# Altium PCB PWR MOD 1.0.PcbDoc
Units mil, origin at the board's own origin, x right, y up, seen from the top; angles counter-clockwise.
Board outline 2750 x 1732.28 mil, 2 copper layers (Top Layer, Bottom Layer), stack 63.824 mil thick; 62 components, 32 nets, 181 pads, 214 vias.
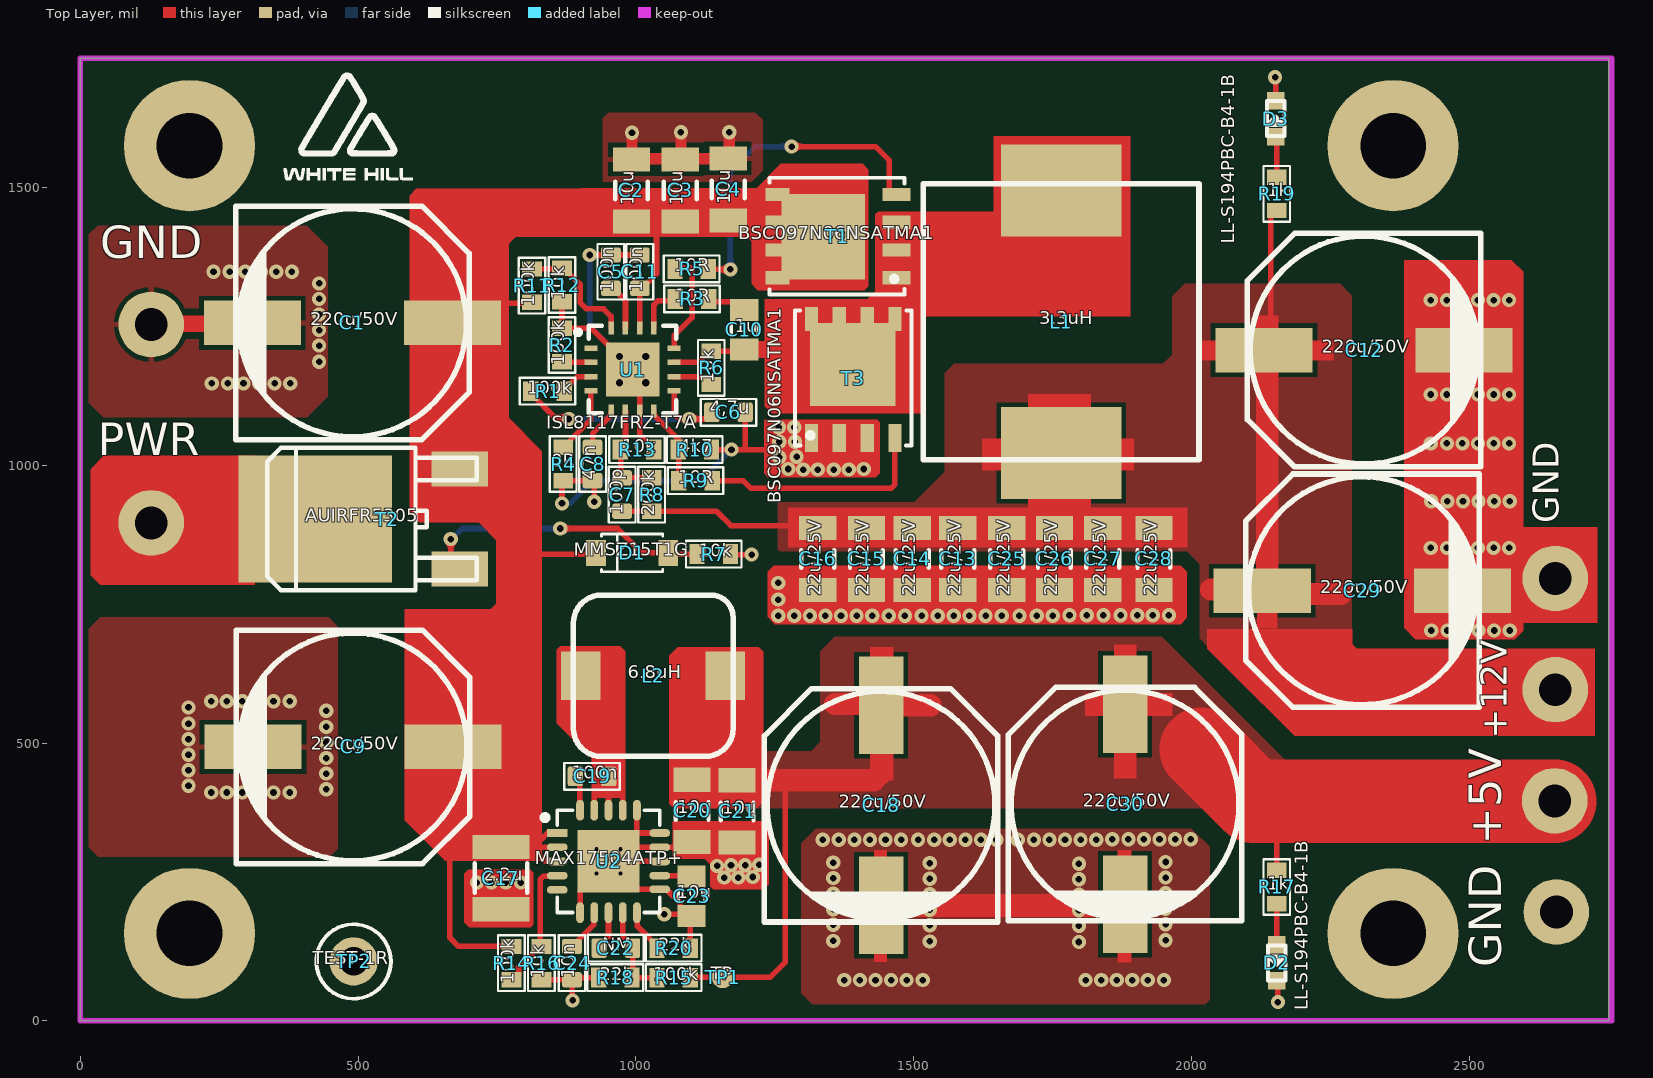
[diagram p0: Top Layer view]
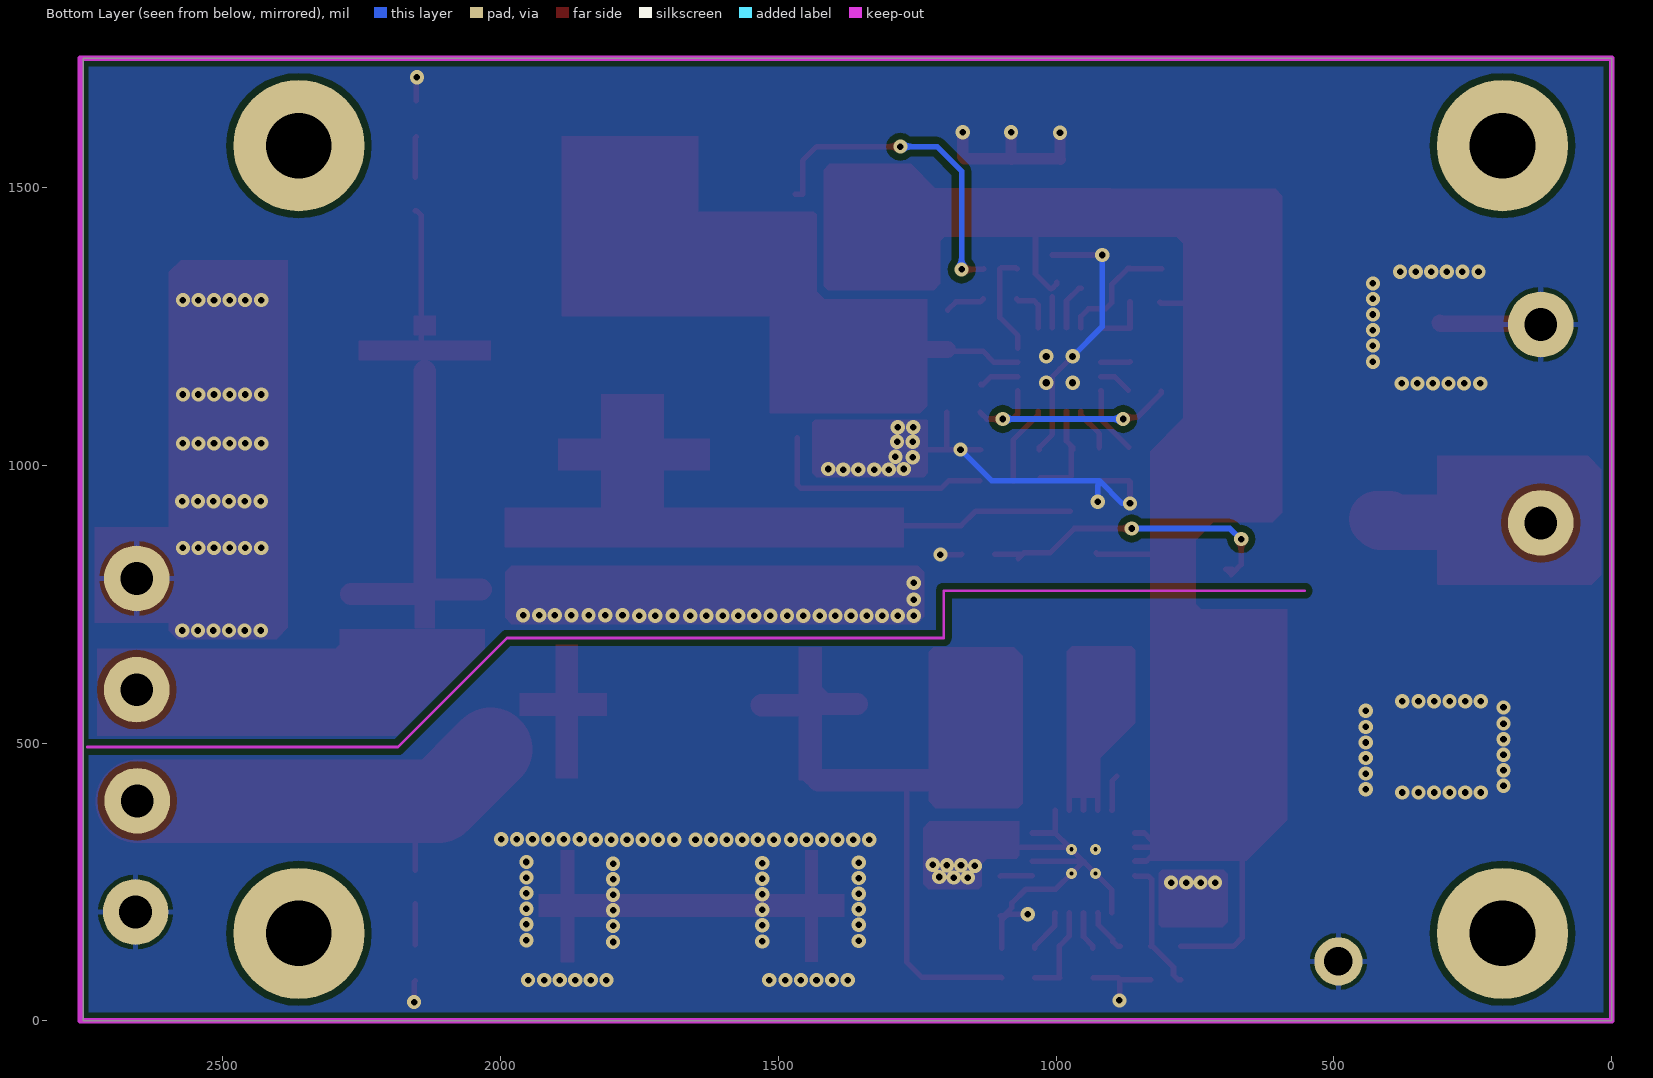
[diagram p1: Bottom Layer view, seen from below]
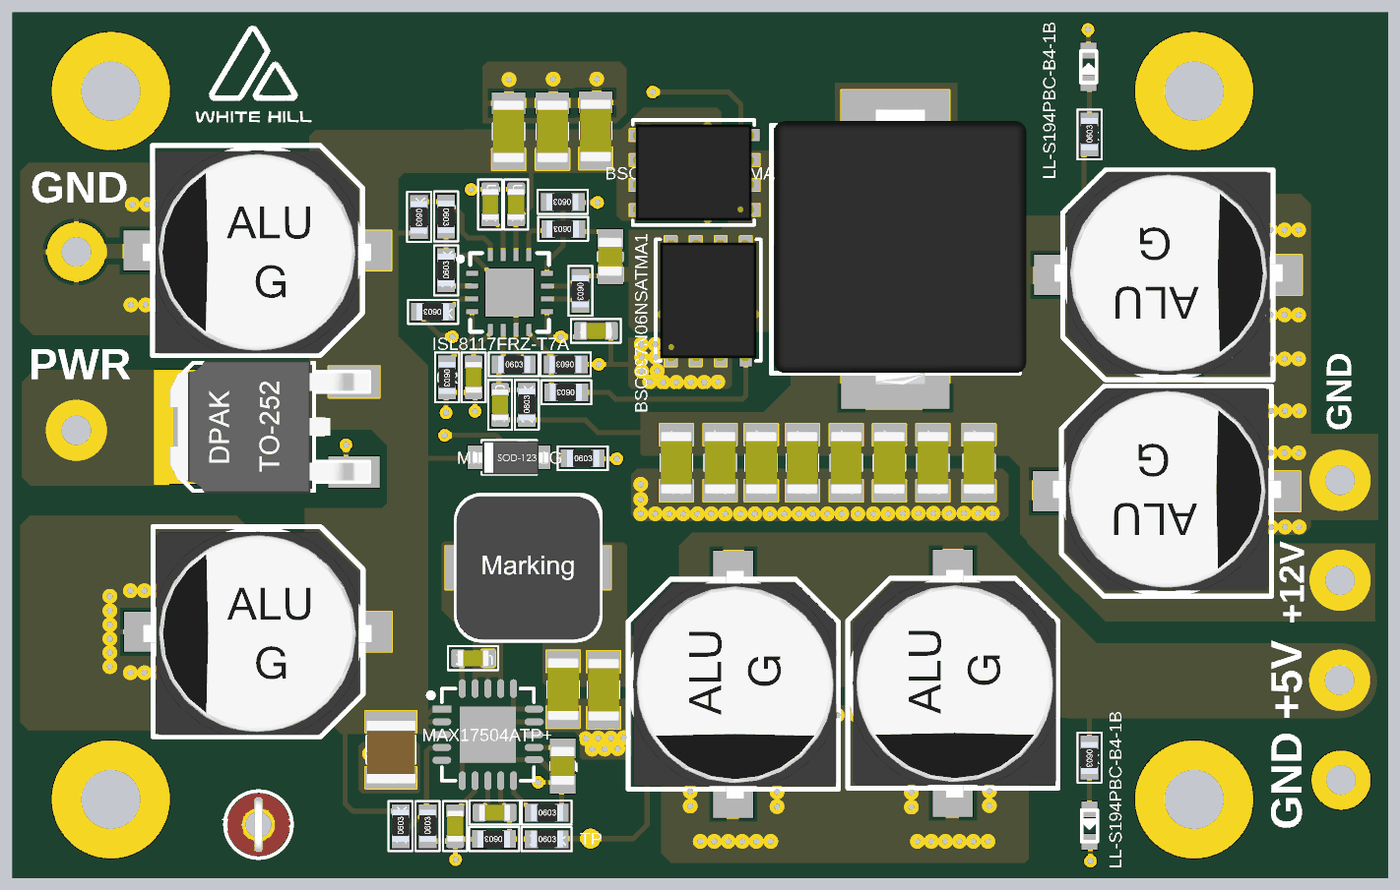
[diagram p2: 3D render of the assembled board from above, using the file's embedded part models]

## Layer stack, top to bottom
Top Solder: solder mask 0.4, Solder Resist, Dk 3.5
Top Layer: signal copper 1.4
Dielectric1: core 61.0236, FR-4, Dk 4.2
Bottom Layer: signal copper 1.4
Bottom Solder: solder mask 0.4, Solder Resist, Dk 3.5

## Board outline
0,0 0,1732.28 2750,1732.28 2750,0

## Design rules (kind name [scope] priority, off if disabled: settings)
Clearance Clearance_1 [(OnLayer('Keep-Out Layer'))] p1: gap=10 ignorepadtopadclearanceinfootprint=FALSE except(0: Arc-Hole Track-Hole SMDPad-Hole THPad-Hole Via-Hole Fill-Hole Poly-Hole Region-Hole Text-Hole)
Clearance Track [istrack vs istrack] p2: gap=6 ignorepadtopadclearanceinfootprint=FALSE except(0: Arc-Hole Track-Hole SMDPad-Hole THPad-Hole Via-Hole Fill-Hole Poly-Hole Region-Hole Text-Hole)
Clearance poly [inpoly] p3: gap=12 ignorepadtopadclearanceinfootprint=FALSE
Clearance [All] p4: gap=7 ignorepadtopadclearanceinfootprint=FALSE except(0: Arc-Hole Track-Hole SMDPad-Hole THPad-Hole Via-Hole Fill-Hole Poly-Hole Region-Hole Text-Hole)
ComponentClearance ComponentClearance_2 [HasFootprint('CR123')] p1: gap=0 collisioncheckmode=3 verticalgap=0 showdistances=TRUE
ComponentClearance ComponentClearance_1 [HasFootprint('ANT1')] p2: gap=0 collisioncheckmode=3 verticalgap=0 showdistances=TRUE
ComponentClearance [All] p3: gap=0 collisioncheckmode=3 verticalgap=0 showdistances=FALSE
HoleSize [All] p1: absolutevalues=TRUE maxlimit=1000 minlimit=10 maxpercent=80.000 minpercent=20.000
PolygonConnect CR123 [HasFootprint('CR123')] p1: connectstyle=Relief reliefconductorwidth=20 reliefentries=4 polygonreliefangle="90 Angle" airgapwidth=10
PolygonConnect coax [HasFootprint('COAXIAL-SWF')] p2: connectstyle=Direct reliefconductorwidth=10 reliefentries=4 polygonreliefangle="90 Angle" airgapwidth=10
PolygonConnect PolygonConnect_1 [isvia] p3: connectstyle=Direct reliefconductorwidth=10 reliefentries=4 polygonreliefangle="90 Angle" airgapwidth=10
PolygonConnect [All] p4: connectstyle=Relief reliefconductorwidth=10 reliefentries=4 polygonreliefangle="90 Angle" airgapwidth=8
RoutingVias [All] p1: holewidth=11.81 width=25.59 viastyle="Through Hole" minholewidth=11.81 minwidth=25.59 maxholewidth=11.81 maxwidth=25.59
SolderMaskExpansion SolderMaskExpansion_1 [isvia] p1: expansion=-100
SolderMaskExpansion [All] p2: expansion=2
Width [All] p1: maxlimit=200 minlimit=6 preferedwidth=10 minimp=50.000000 maximp=50.000000 favimp=50.000000
28 further rules are at their usual default settings.

## Components (designator, comment, footprint, x,y, rotation, side; value= is the part's Value field where it differs from the comment)
C1 "220u/50V" ALU-G 490,1256 r270 top
C2 "10u" C1206 992,1494.1 r90 top
C3 "10u" C1206 1079.8,1494.1 r90 top
C4 "10u" C1206 1166,1495.9 r90 top
C5 "100n" C0603 955,1348 r90 top
C6 "4,7u" C0603 1166.47,1095 r0 top
C7 "100p" C0603 975,947 r270 top
C8 "47n" C0603 922,1002 r270 top
C9 "220u/50V" ALU-G 491,493 r270 top
C10 "1u" C0805-10 1195,1243.43 r270 top
C11 "100n" C0603 1007,1348 r270 top
C12 "220u/50V" ALU-G 2310,1207 r90 top
C13 "22u/25V" C1206 1579,831.1 r270 top
C14 "22u/25V" C1206 1497,831.1 r270 top
C15 "22u/25V" C1206 1414.78,831.1 r270 top
C16 "22u/25V" C1206 1327,831.1 r270 top
C17 "2.2u" C1210 757,257 r180 top
C18 "220u/50V" ALU-G 1441,388 r0 top
C19 "100n" C0603 921,440 r0 top
C20 "10u" C1206 1101,377.9 r270 top
C21 "10u" C1206 1182,376.9 r270 top
C22 "NM" C0603 964,131 r0 top
C23 "10u" C0805-10 1100,224.57 r270 top
C24 "10n" C0603 885,104 r90 top
C25 "22u/25V" C1206 1667,831.1 r270 top
C26 "22u/25V" C1206 1753,831.1 r270 top
C27 "22u/25V" C1206 1840,831.1 r270 top
C28 "22u/25V" C1206 1932,831.1 r270 top
C29 "220u/50V" ALU-G 2307,774 r90 top
C30 "220u/50V" ALU-G 1880,390 r0 top
D1 "MMSZ15T1G" SOD123 993,842 r0 top
D2 "LL-S194PBC-B4-1B" LED0603B 2153,104.58 r270 top
D3 "LL-S194PBC-B4-1B" LED0603B 2151,1623.36 r90 top
L1 "3.3uH" HPI1260 1765,1258 r90 top
L2 "6.8uH" "L 7x7" 1031,621 r0 top
R1 "100k" R0603 840.94,1133 r180 top
R2 "100k" R0603 867,1216 r90 top
R3 "10R" R0603 1101,1299 r180 top
R4 "0R" R0603 869,1002 r270 top
R5 "10R" R0603 1100.17,1353 r180 top
R6 "10k" R0603 1135.48,1175 r270 top
R7 "10k" R0603 1140,840 r0 top
R8 "200k" R0603 1028.27,947 r90 top
R9 "10R" R0603 1107.28,972 r180 top
R10 "4k7" R0603 1106,1028 r180 top
R11 "100k" R0603 813,1323 r270 top
R12 "10k" R0603 867,1324 r270 top
R13 "10k" R0603 1002,1028 r0 top
R14 "100k" R0603 776,104 r90 top
R15 "100k" R0603 1068,77.93 r0 top
R16 "10k" R0603 830,104 r90 top
R17 "1k" R0603 2153,241 r270 top
R18 "22k" R0603 963,78 r180 top
R19 "1k" R0603 2153,1488 r90 top
R20 "22k" R0603 1068,131 r0 top
T1 "BSC097N06NSATMA1" "PowerPAK SO-8" 1362,1412 r180 top
T2 "AUIRFR5305" DPAK 553,903 r180 top
T3 "BSC097N06NSATMA1" "PowerPAK SO-8" 1391,1156 r90 top
TP1 "TP" TP 1156,79 r90 top
TP2 "TEST-1R" TP-O 492,107 r0 top
U1 "ISL8117FRZ-T7A" QFN-16-0.5 994,1172 r0 top
U2 "MAX17504ATP+" TQFN-20_5x5 950.67,287 r0 top

## Footprints (in the part's own frame and the unit in brackets; to place one, negate y for a bottom-side part, rotate by r counter-clockwise, add the part's x,y. Pads: shape width x height; smd on the part's side, far side on the other; paste and mask are expansions set on the pad)
ALU-G [mil]
  rect 80x175 smd: 1(0,180) 2(0,-180)
  silkscreen extent -210,-210 210,210, body extent -199,-229 207,227, height 402
C0603 [mm] "Chip Capacitor, Body 1.6x0.8mm, IPC High Density"
  rrect30% 0.7x0.9 smd: 1(-0.762,0) 2(0.762,0)
  silkscreen extent -1.27,-0.61 1.27,0.61, body extent -0.8,-0.4 0.8,0.4, height 0.5
C0805-10 [mm]
  rect 1x1.3 smd: 1(-0.9,0) 2(0.9,0)
  silkscreen extent -0.2,-0.6 0.2,0.6, body extent -1,-0.63 1,0.63, height 1
C1206 [mm]
  rect 1.1x1.7 smd: 1(-1.425,0) 2(1.425,0)
  silkscreen extent -0.4,-0.75 0.4,0.75, body extent -1.6,-0.8 1.6,0.8, height 1
C1210 [mm]
  rect 2.6x1.1 smd: 1(0,-1.425) 2(0,1.425)
  silkscreen extent -1.2,-0.67 1.2,0.67, body extent -1.25,-1.47 1.25,1.73, height 2.5
DPAK [mm]
  rect 2.6x1.6 smd: 1(-3.302,2.286) 3(-3.302,-2.286)
  rect 7x5.8 smd paste-3.048: 2(3.302,0)
  silkscreen extent -4.07,-3.25 5.5,3.25, body extent -4.08,-3.37 6.02,3.37, height 2.41
HPI1260 [mm] "SMT Power Inductor"
  rect 4.2x5.5 smd: 1(6,0) 2(-6,0)
  silkscreen extent -6.3,-6.3 6.3,6.3, body extent -6.87,-6.65 7.13,6.15, height 5.01
"L 7x7" [mm]
  rect 1.8x2.2 smd: 1(-3.3,0) 2(3.3,0)
  silkscreen extent -3.64,-3.68 3.66,3.68, body extent -3.65,-3.65 3.65,3.65, height 4.51
LED0603B [mm]
  rect 0.8x0.8 smd mask+0.051: A(-0.825,0) K(0.825,0)
  silkscreen extent -0.8,-0.4 0.8,0.4, body extent -0.8,-0.4 0.8,0.4, height 0.65
"PowerPAK SO-8" [mm]
  rect 3.81x3.91 smd: D(0.635,0.025)
  rect 1.1x0.61 smd: D(2.718,1.905) D(2.718,-0.635) D(2.718,0.635) D(2.718,-1.905)
  rect 1.27x0.61 smd: G(-2.718,-1.905) S(-2.718,1.905) S(-2.718,-0.635) S(-2.718,0.635)
  silkscreen extent -3.07,-2.67 3.1,2.67, body extent -3.07,-2.57 3.08,2.58, height 1.04
QFN-16-0.5 [mm] "QFN, 16-Leads, Body"
  rect 0.6x0.25 smd: 1(-1.9,0.975) 2(-1.9,0.325) 3(-1.9,-0.325) 4(-1.9,-0.975) 9(1.9,-0.975) 10(1.9,-0.325) 11(1.9,0.325) 12(1.9,0.975)
  rect 0.25x0.6 smd: 5(-0.975,-1.9) 6(-0.325,-1.9) 7(0.325,-1.9) 8(0.975,-1.9) 13(0.975,1.9) 14(0.325,1.9) 15(-0.325,1.9) 16(-0.975,1.9)
  rect 2.45x2.45 smd: 17(0,0)
  silkscreen extent -2.6,-2 2,2, body extent -2,-2 2,2, height 0.8
R0603 [mm] "Chip Resistor, Body 1.6x0.8mm, IPC High Density"
  rect 0.7x0.9 smd: 1(-0.762,0) 2(0.762,0)
  silkscreen extent -1.27,-0.61 1.27,0.61, body extent -0.8,-0.42 0.84,0.43, height 0.46
SOD123 [mm]
  rect 0.9x1.2 smd: 1(1.65,0) 2(-1.65,0)
  silkscreen extent -1.4,-0.86 1.4,0.86, body extent -1.85,-0.86 2,0.84, height 1.46
TP [mil]
  round 40 smd paste-100: 1(0,0)
TP-O [mm]
  round 2.2 hole 1.3 paste-2.54: 1(0,0)
  silkscreen extent -1.7,-1.7 1.7,1.7, body extent -1.59,-1.59 1.59,1.59, height 8.13
TQFN-20_5x5 [mm]
  rect 0.95x0.35 smd mask+0: 1(-2.34,1.3)
  oval 0.95x0.35 smd mask+0: 2(-2.34,0.65) 3(-2.34,0) 4(-2.34,-0.65) 5(-2.34,-1.3) 11(2.34,-1.27) 12(2.34,-0.65) 13(2.34,0) 14(2.34,0.65) 15(2.34,1.3)
  oval 0.35x0.95 smd mask+0: 6(-1.3,-2.34) 7(-0.65,-2.34) 8(0,-2.34) 9(0.65,-2.34) 10(1.3,-2.34) 16(1.3,2.34) 17(0.65,2.34) 18(0,2.34) 19(-0.65,2.34) 20(-1.3,2.34)
  rect 2.85x2.85 smd mask+0: 21(0,0)
  silkscreen extent -3.02,-2.34 2.34,2.34, body extent -2.34,-2.34 2.34,2.34, height 0.8

## Part data
C1 C9 C12 C18 C29 C30: library part CAP-EL, "Capacitor: electrolytic; low impedance; 220uF; 50VDC; Case: G", Manufacturer=Panasonic, Part Number=EEEFP1H221AP, ComponentLink1Description=Datasheet, ComponentLink1URL=D:\Datasheets\PANASONIC_FP.pdf, ComponentLink2Description=Dostawca, ComponentLink2URL=http://www.tme.eu/pl/katalog/?idp=1&search=EEEFP1H221AP, Supplier=TME, Supplier Code=EEEFP1H221AP
C2 C3 C4: library part C-028, "Capacitor: ceramic; 10uF; 50V; X7R; ±10%; SMD; 1206", Manufacturer=Samnsung, Part Number=CL31A106KBHNNNE, ComponentLink1Description=Datasheet, ComponentLink1URL=D:\Datasheets\.pdf, ComponentLink2Description=Dostawca, ComponentLink2URL=http://www.tme.eu/pl/katalog/?idp=1&search=CL31A106KBHNNNE, Indeks=C-0028, Supplier=TME, Supplier Code=CL31A106KBHNNNE
C5 C11 C19: library part C-013, "Capacitor: ceramic; 100nF; 50V; X7R; ±10%; SMD; 0603; Series: GRM", Manufacturer=Murata, Part Number=GRM188R71H104KA93D, ComponentLink1Description=Datasheet, ComponentLink1URL=D:\Datasheets\.pdf, ComponentLink2Description=Dostawca, ComponentLink2URL=http://www.tme.eu/pl/katalog/?idp=1&search=GRM188R71H104KA93D, Indeks=C-0013, Supplier=TME, Supplier Code=GRM188R71H104KA93D
C6: library part C-031, "Capacitor: ceramic;4,7uF ; 50V; X7R; ±5%; SMD; 0603", Manufacturer=Samsung, Part Number=0603X475K100CT, ComponentLink1Description=Datasheet, ComponentLink1URL=D:\Datasheets\.pdf, ComponentLink2Description=Dostawca, ComponentLink2URL=https://www.tme.eu/pl/katalog/?search=0603X475K100CT, Indeks=C-031, Supplier=TME, Supplier Code=0603X475K100CT
C7: library part C-005, "Capacitor: ceramic; MLCC; 100pF; 50V; C0G; ±1%; SMD; 0603", Manufacturer=Vishay, Part Number=VJ0603A101FXACW1BC, ComponentLink1Description=Datasheet, ComponentLink1URL=D:\Datasheets\.pdf, ComponentLink2Description=Dostawca, ComponentLink2URL=http://www.tme.eu/pl/katalog/?idp=1&search=VJ0603A101FXACW1BC, Indeks=C-005, Supplier=TME, Supplier Code=VJ0603A101FXACW1BC
C8: library part C-012, "Capacitor: ceramic; MLCC; 47nF; 50V; X7R; ±10%; SMD; 0603", Manufacturer=Kemet, Part Number=C0603C473K5RACTU, ComponentLink1Description=Datasheet, ComponentLink1URL=D:\Datasheets\.pdf, ComponentLink2Description=Dostawca, ComponentLink2URL=http://www.tme.eu/pl/katalog/?idp=1&search=C0603C473K5RAC, Indeks=C-0012, Supplier=TME, Supplier Code=C0603C473K5RAC
C10: library part C-017, "Capacitor: ceramic; MLCC; 1uF; 50V; X7R; SMD; 0805", Manufacturer=Samsung, Part Number=CL21B105KBFNNNG, ComponentLink1Description=Datasheet, ComponentLink1URL=D:\Datasheets\.pdf, ComponentLink2Description=Dostawca, ComponentLink2URL=http://www.tme.eu/pl/katalog/?idp=1&search=CL21F105ZBFNNNE, Indeks=C-0017, Supplier=TME, Supplier Code=CL21B105KBFNNNG
C13 C14 C15 C16 C25 C26 C27 C28: library part C-029, "Capacitor: ceramic; 22uF; 25V; X7R; ±10%; SMD; 1206", Manufacturer=Murata, Part Number=GRM31CR61E226KE15L, ComponentLink1Description=Datasheet, ComponentLink1URL=D:\Datasheets\.pdf, ComponentLink2Description=Dostawca, ComponentLink2URL=http://www.tme.eu/pl/katalog/?idp=1&search=GRM31CR61E226KE15L, Indeks=C-0029, Supplier=TME, Supplier Code=GRM31CR61E226KE15L
C17: library part C-020, "Capacitor: ceramic; MLCC; 2,2uF; 100V; X7R; ±10%; SMD; 1210", Manufacturer=Samnsung, Part Number=CL32B225KCJSNNE, ComponentLink1Description=Datasheet, ComponentLink1URL=D:\Datasheets\.pdf, ComponentLink2Description=Dostawca, ComponentLink2URL=http://www.tme.eu/pl/katalog/?idp=1&search=CL32B225KCJSNNE, Indeks=C-0020, Supplier=TME, Supplier Code=CL32B225KCJSNNE
C20 C21: library part C-022, "Capacitor: ceramic; 10uF; 35V; X7R; ±10%; SMD; 1206", Manufacturer=Samnsung, Part Number=CL31B106KLHNNNE, ComponentLink1Description=Datasheet, ComponentLink1URL=D:\Datasheets\.pdf, ComponentLink2Description=Dostawca, ComponentLink2URL=http://www.tme.eu/pl/katalog/?idp=1&search=CL31B106KLHNNNE, Indeks=C-0019, Supplier=TME, Supplier Code=CL31B106KLHNNNE
C22: library part C-013, Manufacturer=Murata, ComponentLink1Description=Datasheet, ComponentLink1URL=D:\Datasheets\.pdf, ComponentLink2Description=Dostawca, Indeks=C-0013, Supplier=TME
C23: library part C-019, "Capacitor: ceramic; MLCC; 10uF; 16V; X5R; ±10%; SMD; 0805", Manufacturer=Samnsung, Part Number=CL21A106KOQNNNG, ComponentLink1Description=Datasheet, ComponentLink1URL=D:\Datasheets\.pdf, ComponentLink2Description=Dostawca, ComponentLink2URL=http://www.tme.eu/pl/katalog/?idp=1&search=CL21A106KOQNNNG, Indeks=C-0019, Supplier=TME, Supplier Code=CL21A106KOQNNNG
C24: library part C-011, "Capacitor: ceramic; MLCC; 10nF; 50V; X7R; ±5%; SMD; 0603", Manufacturer=Vishay, Part Number=VJ0603Y103JXACW1BC, ComponentLink1Description=Datasheet, ComponentLink1URL=D:\Datasheets\.pdf, ComponentLink2Description=Dostawca, ComponentLink2URL=http://www.tme.eu/pl/katalog/?idp=1&search=VJ0603Y103JXACW1BC, Indeks=C-0011, Supplier=TME, Supplier Code=VJ0603Y103JXACW1BC
D1: library part D_ZEN, "Dioda: Zenera; 0,5W; 18V; SMD", Manufacturer="ON Semi", ComponentLink1Description=Datasheet, ComponentLink1URL=D:\Datasheets\MMSZxxxT1G.pdf, ComponentLink2Description=Dostawca, ComponentLink2URL=http://www.tme.eu/pl/katalog/?idp=1&search=MMSZ15T1G, Part Number=MMSZ15T1G, Supplier=TME, Supplier Code=MMSZ15T1G
D2 D3: library part LED_1, "LED; SMD; 0603; blue; 20-40mcd; 1.6x0.8x0.4mm; 130°; 2.8÷3.8V; 20mA", Manufacturer=LuckyLight, ComponentLink1Description=Datasheet, ComponentLink1URL=D:\Datasheets\.pdf, ComponentLink2Description=Dostawca, Part Number=LL-S194PBC-B4-1B, Supplier=TME, Supplier Code=LL-S194PBC-B4-1B
L1: library part L_HPI_3.3uH, "Inductor: wire; SMD; 3.3uH; Ioper:14A; 2.45mOhm; ±20%; Isat:15A", Manufacturer=Ferrocore, Part Number=HPI1260-3R3, ComponentLink1Description=Datasheet, ComponentLink1URL=E:\Datasheets\HPI1260.pdf, ComponentLink2Description=Dostawca, ComponentLink2URL=http://www.tme.eu/pl/katalog/?idp=1&search=HPI1260-3R3, Indeks=IND, Supplier=TME, Supplier Code=HPI1260-3R3
L2: library part L, "Inductor: wire; SMD; 6.8uH; Ioper:4.3A; 53m?; ±20%; Isat:4.9A", Manufacturer=Ferrocore, Part Number=HPI0630-6R8, ComponentLink1Description=Datasheet, ComponentLink1URL=D:\Datasheets\de.pdf, ComponentLink2Description=Dostawca, ComponentLink2URL=http://www.tme.eu/pl/katalog/?idp=1&search=HPI0630-6R8, Indeks=IND, Supplier=TME, Supplier Code=HPI0630-6R8
R1 R2 R11 R14 R15: library part R-013, "Resistor: thick film; SMD; 0603; 100k; 0.125W; ±5%", Manufacturer=Walsin, Part Number=WF06P104JTL, Tolerance=5%, ComponentLink1Description=Datasheet, ComponentLink1URL=D:\Datasheets\.pdf, ComponentLink2Description=Dostawca, ComponentLink2URL=http://www.tme.eu/pl/katalog/?idp=1&search=WF06P-100K-5%, Indeks=R-011, Supplier=TME, Supplier Code=WF06P-100K-5%
R3 R5 R9: library part R-001, "Resistor: thick film; SMD; 0603; 10R; 0.1W; ±5%", Manufacturer="Royal Ohm", Part Number=0603SAJ0100T5E, Tolerance=5%, ComponentLink1Description=Datasheet, ComponentLink1URL=D:\Datasheets\.pdf, ComponentLink2Description=Dostawca, ComponentLink2URL=http://www.tme.eu/pl/katalog/?idp=1&search=SMD0603-10R, Indeks=R-001, Supplier=TME, Supplier Code=SMD0603-10R
R4: library part R-018, "Resistor: thick film; SMD; 0603; 0R; 0.125W; ±5%", Manufacturer="Royal Ohm", Part Number=CRCW06030000Z0TABC, Tolerance=1%, ComponentLink1Description=Datasheet, ComponentLink1URL=D:\Datasheets\.pdf, ComponentLink2Description=Dostawca, ComponentLink2URL=http://www.tme.eu/pl/katalog/?idp=1&search=CRCW06030000Z0TABC, Indeks=R-018, Supplier=TME, Supplier Code=CRCW06030000Z0TABC
R6 R7 R12 R13 R16: library part R-012, "Resistor: thick film; SMD; 0603; 10k; 0.125W; ±5%", Manufacturer=Walsin, Part Number=WF06P103JTL, Tolerance=5%, ComponentLink1Description=Datasheet, ComponentLink1URL=D:\Datasheets\.pdf, ComponentLink2Description=Dostawca, ComponentLink2URL=http://www.tme.eu/pl/katalog/?idp=1&search=WF06P-10K-5%, Indeks=R-011, Supplier=TME, Supplier Code=WF06P-10K-5%
R8: library part R-042, "Resistor: thick film; SMD; 0805; 200k; 0.125W; ±5%;", Manufacturer="Royal Ohm", Part Number=0603SAJ0204T5E, Tolerance=5%, ComponentLink1Description=Datasheet, ComponentLink1URL=D:\Datasheets\.pdf, ComponentLink2Description=Dostawca, ComponentLink2URL=http://www.tme.eu/pl/katalog/?idp=1&search=CS05JTGVR220, Indeks=R-042, Supplier=TME, Supplier Code=SMD0603-200K
R10: library part R-011, "Resistor: thick film; SMD; 0603; 4.7k; 0.125W; ±5%", Manufacturer=Walsin, Part Number=WF06P472JTL, Tolerance=5%, ComponentLink1Description=Datasheet, ComponentLink1URL=D:\Datasheets\.pdf, ComponentLink2Description=Dostawca, ComponentLink2URL=http://www.tme.eu/pl/katalog/?idp=1&search=WF06P-4K7-5%, Indeks=R-011, Supplier=TME, Supplier Code=WF06P-4K7-5%
R17 R19: library part R-005, "Resistor: thick film; SMD; 0603; 1k; 0.1W; ±5%", Manufacturer="Royal Ohm", Part Number=0603SAJ0102T5E, Tolerance=5%, ComponentLink1Description=Datasheet, ComponentLink1URL=D:\Datasheets\.pdf, ComponentLink2Description=Dostawca, ComponentLink2URL=http://www.tme.eu/pl/katalog/?idp=1&search=SMD0603-1K, Indeks=R-004, Supplier=TME, Supplier Code=SMD0603-1K
R18 R20: library part R-027, "Resistor: thick film; SMD; 0603; 22k; 0.1W; ±5%;", Manufacturer="Royal Ohm", Part Number=SMD0603-22K, Tolerance=5%, ComponentLink1Description=Datasheet, ComponentLink1URL=D:\Datasheets\.pdf, ComponentLink2Description=Dostawca, ComponentLink2URL=http://www.tme.eu/pl/katalog/?idp=1&search=SMD0603-22K, Indeks=R-027, Supplier=TME, Supplier Code=0603SAJ0223T5E
T1 T3: library part NVMFS5C426NAFT1G, "Transistor N MOS 60V;10 mOhm;46A", Manufacturer=Infineon, ComponentLink1Description=Datasheet, ComponentLink1URL=E:\Datasheets\NVMFS5C426NAFT1G.pdf, ComponentLink2Description=Dostawca, ComponentLink2URL=https://pl.mouser.com/ProductDetail/ON-Semiconductor/NVMFS5C426NAFT1G?qs=%2fha2pyFadugLwIkhTqkZTOZfrb%252b8fUFxyykPvHBDJB%2fODM3St1Y24x7PSds6Ow9j, Indeks=TRAN, Part Number=BSC097N06NSATMA1, Supplier=TME, Supplier Code=BSC097N06NSATMA1
T2: library part IRFR5410PBF, "Transistor: P-MOSFET; unipolar; -55V; -31A; 110W; DPAK", Manufacturer=IR, ComponentLink1Description=Datasheet, ComponentLink1URL=D:\Datasheets\IPD042P03L3GBTMA1.pdf, ComponentLink2Description=Dostawca, ComponentLink2URL=http://www.tme.eu/pl/katalog/?idp=1&search=IPD042P03L3GBTMA1, Indeks=TRAN, Part Number=AUIRFR5305, Supplier=TME, Supplier Code=AUIRFR5305
TP1: "Test point", ComponentLink1Description=Datasheet, ComponentLink1URL=D:\Datasheets\.pdf, ComponentLink2Description=Dostawca
TP2: library part TP_O, "Sprezynka pomiarowa czerwona", ComponentLink1Description=Datasheet, ComponentLink1URL=D:\Datasheets\.pdf, ComponentLink2Description=Dostawca, Part Number=TEST-1R, Supplier=TME, Supplier Code=TEST-1R
U1: library part ISL8117, "Synchronous Step-Down PWM Controller 60V 2MHz", Manufacturer=Renesas, ComponentLink1Description=Datasheet, ComponentLink1URL=E:\Datasheets\isl8117.pdf, ComponentLink2Description=Dostawca, ComponentLink2URL=https://pl.farnell.com/search?st=ISL8117FRZ, Part Number=ISL8117FRZ-T7A, Supplier=Farnell, Supplier Code=2543368, Uwagi="Z literka A zewnêtrnz komp. unikaæ"
U2: library part MAX17503, "4.5V–60V, 3.5A, High-Efficiency, Synchronous  Step-Down DC-DC Converter", Manufacturer=Maxim, Part Number=MAX6143AASA10+, ComponentLink1Description=Datasheet, ComponentLink1URL=E:\Datasheets\MAX17504.pdf, ComponentLink2Description=Dostawca, ComponentLink2URL=http://pl.farnell.com//2514237, Supplier=Farnell, Supplier Code=2514237

## Free pads (board coordinates)
  round 236.22 hole 118.11: 0(196.85,1574.8) 0(196.85,157.48) 0(2362.2,157.48) 0(2362.2,1574.8)
  round 118.11 hole 59.06: 2(128,896) 2(128,1253) 2(2653,396) 2(2654,596) 2(2654,796) 2(2656,196)

## Via types
v1: diameter 25.59, hole 11.81, Top Layer to Bottom Layer, 206 vias
v2: diameter 25.98, hole 12.99, Top Layer to Bottom Layer, tented top, 4 vias
v3: diameter 19.68, hole 7.87, Top Layer to Bottom Layer, 4 vias

## Nets (pads, with @x,y where several pads share a name; then routed paths per layer and width w, separated by ;. In a path a pad name is that pad's centre, name@x,y a point inside that pad or via, vN(x,y) a via of type N, cw(c..) or ccw(c..) an arc to the next point about the centre after c; other vN are vias at no path point)
+5V: C18.1 C20.1 C21.1 C30.1 L2.2 pad.2@2653,396 R15.2 R17.1 TP1.1 | length 2167.4
  Top Layer w10: R15.2 1099.07,79 TP1.1 1242,79 1268.8,105.8 1268.8,433 ; 2111,395 2153,353 R17.1
  Top Layer w40: C20.1 1101.5,433.5 C21.1@1172.61,433.5 ; L2.2 1171.46,610.46 1171.46,434.65 C21.1@1172.61,433.5 ; 1358,570 1418,570 C18.1@1441,593 ; 1530,568 C18.1 1441,446.24 1427.76,433 1268.8,433 C21.1 1181.5,433.5 C21.1@1172.61,433.5
  Top Layer w150: 2017,489 2111,395 pad.2@2653,395
+12V6: C7.2 C12.1 C13.1 C14.1 C15.1 C16.1 C25.1 C26.1 C27.1 C28.1 C29.1 L1.2 pad.2@2654,596 R8.1 R19.1 | length 2005.8
  Top Layer w10: C7.2 R8.1 1145,917 1171,891 1323.2,891 C16.1 ; C12.1 2142,1219 2142,1449.22 2150.78,1458 R19.1
  Top Layer w20: C16.1 C15.1 C14.1 C13.1 C25.1 C26.1 ; L1.2 1753,1009.78 C26.1 ; C28.1 C27.1 C26.1
  Top Layer w40: 2035,776 2125,776 C29.1 ; C12.1@2136,1169 2136,783 C29.1 ; 2268,768 2133,768 C29.1
+VBAT: pad.2@128,896 T2.2 | length 318.1
  Top Layer w100: pad.2@131,897 417,897 T2.2 T2.2@399.38,903
GND: C1.2 C2.2 C3.2 C4.2 C5.2 C6.2 C8.2 C9.2 C11.1 C12.2 C13.2 C14.2 C15.2 C16.2 C17.2 C18.2 C20.2 C21.2 C23.2 C24.1 C25.2 C26.2 C27.2 C28.2 C29.2 C30.2 D2.K D3.K pad.2@128,1253 pad.2@2654,796 pad.2@2656,196 R2.2 R4.2 R7.2 R10.1 R12.2 R13.2 R16.1 R18.2 R20.2 T3.S TP2.1 U1.7 U1.17 U2.6 U2.11 U2.13 U2.14 U2.15 U2.16 U2.21 | length 3997.6
  Top Layer w10: R16.1 C24.1 ; v1(867,931.1) 867,969.87 866.93,969.93 R4.2 C8.2 924.98,969.02 v1(924.98,934.02) ; R12.2 R2.2 920,1246 v2(970.38,1195.62) U1.17 1006.8,1159.2 U1.7 1006.8,1055.14 1030,1031.94 R13.2@1030,1028 ; v1(886,37) 885.5,37.5 885.5,73.5 C24.1 ; U2.6 899.57,194.95 899.57,235.9 v3(929.01,265.35) U2.21 ; v1(917,1378) C5.2 C11.1 ; R18.2 889,78 C24.1 ; U2.16 1001.77,379.05 U2.21@1001.77,338.1 ; U2.13 U2.21 ; U2.15 1042.71,338.1 U2.21@1001.77,338.1 ; v1(1051,192) 1086.87,192 1094.87,184 C23.2@1098,187.13 ; R20.2 C23.2@1098,187.13 ; R10.1 v1(1172,1028) 1196.47,1028 ; R7.2 1171,839 v1(1208,839) ; C21.2 1173.8,312.59 U2.14 U2.21@976.26,312.59 ; C6.2 1196.47,1028 ; 1298,1030 1293,1030 1291,1028 1196.47,1028 ; v1(2150,1698) 2151,1697 D3.K ; D2.K 2155,70.1 v1(2155,34) ; U2.21 v3(972.32,265.35) 1000.67,237 U2.11 1054.6,237 1079.41,212.2 1079.41,203.82 1094.09,189.13 C23.2 C23.2@1098,187.13 ; U2.21 v3(972.32,308.65) U2.21@976.26,312.59 ; U2.21@976.26,312.59 U2.21@1001.77,338.1
  Top Layer w20: C2.2 C2.2@992.9,1551.1 ; v1(992.9,1598) C2.2@992.9,1551.1 ; C3.2 C3.2@1080.7,1551.1 ; v1(1081,1599) 1081,1551.41 C3.2@1080.7,1551.1 ; v1(1168,1599) 1168,1554 C4.2 1165.1,1551.1 C3.2@1080.7,1551.1 ; C16.2@1326,776 C16.2 C15.2 C14.2 C13.2 C25.2 C26.2 C27.2 C28.2 C28.2@1933,776 ; v1(740,249) v1(766,249) ; v1(740,249) v1(714,249) 714,247.49 715.82,245.67 715.82,212.55 727.47,200.9 C17.2@751.65,200.9 ; v1(740,249) 740,212.55 C17.2@751.65,200.9 ; C17.2@751.65,200.9 C17.2 ; C17.2 781.35,200.9 793,212.55 v1(793,249) v1(766,249) ; C17.2 766,209.9 v1(766,249) ; C2.2@992.9,1551.1 C3.2@1080.7,1551.1
  Top Layer w30: pad.2@128,1253 129.5,1254.5 308.5,1254.5 C1.2
  Bottom Layer w10: v1(867,931.1) 881.11,931.1 922.01,972 ; v1(917,1378) 917,1249 v2(970.38,1195.62) ; v1(924.98,934.02) 924.98,963.26 922.01,966.24 922.01,972 ; v1(1172,1028) 1116,972 922.01,972
  other v1: 1375,73.5 1403,73.5 1431,73.5 1459,73.5 1487,73.5 1516,73.5 1809,73.5 1837,73.5 1865,73.5 1893,73.5 1921,73.5 1950,73.5 1797,142 1528.5,143 1355,144 1953,145 1797,171 1528.5,172 1355,173 1953,174 1797,199 1528.5,200 1355,201 1953,202 1797,227 1528.5,228 1355,229 1953,230 1797,255 1528.5,256 1355,257 1159,258 1184,258 1953,258 1210,259 1146,279 1171,280 1196.47,280 1222,281 1797,283 1528.5,284 1355,285 1953,286 1336,326 1365,326 1393,326 1421,326 1449,326 1477,326 1507.73,326 1536.73,326 1564.73,326 1592.73,326 1620.73,326 1648.73,326 1687,326 1716,326 1744,326 1772,326 1800,326 1828,326 1857,327 1886,327 1914,327 1942,327 1970,327 1998,327 236,411 264,411 292,411 320,411 348,411 377,411 443,417 195,423 443,445 195,451 443,473 195,479 443,501 195,507 443,529 195,535 443,558 195,564 236,575 264,575 292,575 320,575 348,575 377,575 2431,702.5 2460,702.5 2488,702.5 2516,702.5 2544,702.5 2572,702.5 1256,729 1285,729 1313,729 1341,729 1369,729 1397,729 1425,729 1455,729 1484,729 1514,729 1543,729 1572,729 1600,729 1629,729 1658,729 1690,729 1721,729 1750,729 1780,730 1811,730 1841,730 1872,730 1902,730 1930,730 1959,730 1256,758 1256,788 2430,851 2459,851 2487,851 2515,851 2543,851 2571,851 2431,935 2460,935 2488,935 2516,935 2544,935 2572,935 1301,992 1327,992 1356,992 1383,992 1274,993 1410,993 1258,1014 1289,1015 2430,1039 2459,1039 2487,1039 2515,1039 2543,1039 2571,1039 1258,1042 1286,1042 1257,1068 1285,1068 2430,1127 2459,1127 2487,1127 2515,1127 2543,1127 2571,1127 237,1147 266,1147 294,1147 322,1147 350,1147 378,1147 430,1186 430,1215 430,1243 430,1271 2430,1297 2459,1297 2487,1297 2515,1297 2543,1297 2571,1297 430,1299 430,1327 240,1348 269,1348 297,1348 325,1348 353,1348 381,1348
  other v2: 970.38,1148.38 1017.62,1148.38 1017.62,1195.62
  other v3: 929.01,308.65
NetC5_1: C5.1 U1.15 | length 84.4
  Top Layer w10: C5.1 958.94,1318 981.2,1295.73 U1.15
NetC7_1: C7.1 R8.2 R13.1 U1.6 | length 184.1
  Top Layer w10: R13.1@970,1028 R13.1@970,1031.94 ; U1.6 981.2,1043.14 R13.1@970,1031.94 ; R8.2 C7.1 972.5,979.5 972.5,1029.44 R13.1@970,1031.94
NetC8_1: C8.1 U1.5 | length 79.5
  Top Layer w10: C8.1@922,1031.66 C8.1 922,1056.85 955.61,1090.46 U1.5
NetC10_1: C10.1 R3.1 | length 72.3
  Top Layer w10: R3.1 1136.45,1293.55 1180.31,1293.55 C10.1
NetC10_2: C10.2 L1.1 R6.1 T1.S T3.D U1.11 | length 517.2
  Top Layer w10: U1.11 1111.34,1184.8 1131.55,1205 R6.1 1192,1205 C10.2 ; T3.D@1466,1263 1466,1434 T1.S@1469,1437
  Top Layer w30: C10.2 1363,1208 T3.D@1390,1181
NetC19_1: C19.1 U2.20 | length 64.4
  Top Layer w10: C19.1 898.76,432.24 898.76,379.85 U2.20
NetC19_2: C19.2 L2.1 U2.17 U2.18 U2.19 | length 697.3
  Top Layer w10: L2.1 L2.1@909.54,612.54 ; U2.19 L2.1@925.08,589.13 ; U2.18 950.67,563.54 ; U2.17 976.26,537.95 950.67,563.54 ; L2.1@909.54,612.54 925.08,597 L2.1@925.08,589.13 ; L2.1@909.54,612.54 909.54,604.67 L2.1@925.08,589.13 ; L2.1@925.08,589.13 950.67,563.54
NetC22_1: C22.1 U2.8 | length 70.8
  Top Layer w10: C22.1 934,134.94 950.67,151.6 U2.8
NetC22_2: C22.2 R15.1 R18.1 U2.9 | length 169.7
  Top Layer w10: U2.9 976.26,152.68 994,134.94 C22.2 994,79 R18.1 993.07,77.93 R15.1
NetC23_1: C23.1 U2.12 | length 57.8
  Top Layer w10: U2.12 1098.59,261.41 C23.1
NetC24_2: C24.2 U2.7 | length 79.8
  Top Layer w10: C24.2 888.94,134 897.72,142.78 897.72,146.72 924.35,173.35 924.35,194.15 U2.7
NetD1_1: D1.1 R7.1 T2.1 | length 577.6
  Top Layer w10: v1(667,867) 667,821 679,809 684.75,803.25 694.5,813 T2.1 ; v1(864,886) 967,886 1011,842 D1.1 D1.1@1059.96,840 ; D1.1@1067.96,832 D1.1@1059.96,840 ; R7.1 D1.1@1059.96,840
  Bottom Layer w10: v1(667,867) 668.51,867 687.51,886 v1(864,886)
NetD2_A: D2.A R17.2 | length 73.9
  Top Layer w10: D2.A R17.2
NetD3_A: D3.A R19.2 | length 73.7
  Top Layer w10: D3.A 2153,1588.88 R19.2
NetR1_1: R1.1 U1.3 | length 58.8
  Top Layer w10: R1.1@870.43,1134.9 894.66,1159.13 919.12,1159.13 U1.3
NetR2_1: R2.1 U1.2 | length 52.7
  Top Layer w10: R2.1 868.13,1184.87 919.12,1184.87 U1.2
NetR3_2: R3.2 U1.13 | length 84.6
  Top Layer w10: U1.13 1032.39,1288.39 1040,1296 1068,1296 R3.2
NetR4_1: R4.1 U1.4 | length 122.7
  Top Layer w10: R4.1 918.54,1081.54 918.54,1133.54 918.61,1133.61 U1.4
NetR5_1: R5.1 T1.G | length 605.8
  Top Layer w10: R5.1 1131.17,1352 v1(1170,1352) ; v1(1280,1573) 1431,1573 1456.01,1547.99 1456.01,1487 T1.G
  Bottom Layer w10: v1(1170,1352) 1170,1529 1214,1573 v1(1280,1573)
NetR5_2: R5.2 U1.12 | length 188.4
  Top Layer w10: U1.12 1068.8,1233.06 1101,1265.26 1101,1352.95 1098.95,1355 1072.17,1355 R5.2
NetR6_2: R6.2 U1.10 | length 72.6
  Top Layer w10: U1.10 1117.34,1159.2 1131.55,1145 R6.2
NetR9_1: R9.1 T3.G | length 421.4
  Top Layer w10: R9.1 1193,972 1207,958 1459,958 1466,965 T3.G
NetR9_2: R9.2 R10.2 U1.8 | length 143.8
  Top Layer w10: U1.8 1032.39,1090.46 1077.28,1045.57 R9.2
NetR11_1: R11.1 R12.1 U1.16 | length 221.8
  Top Layer w10: R11.1@810,1353 810.5,1353.5 866.5,1353.5 R12.1 870.94,1354 899.51,1325.43 899.51,1292.49 911,1281 942,1281 955.54,1267.46 955.54,1246.88 U1.16
NetR14_1: R14.1 R16.2 U2.4 | length 241.2
  Top Layer w10: R14.1 779.94,74 788.72,82.78 788.72,96.65 826.06,134 R16.2@827.84,134 ; R16.2 R16.2@827.84,134 ; U2.4 857.82,260.69 833.7,260.69 827.84,254.83 R16.2@827.84,134
NetR20_1: R20.1 U2.10 | length 78.8
  Top Layer w10: U2.10 1002.57,194.15 1002.57,170.37 1038,134.94 R20.1
VBAT: C1.1 C2.1 C3.1 C4.1 C9.1 C11.2 C17.1 D1.2 R11.2 R14.2 T1.D T2.3 U1.14 U2.1 U2.2 U2.3 | length 3183.2
  Top Layer w10: C1.1 705,1291 811,1291 R11.2 ; T2.3 T2.3@709,967 ; R14.2 681,134 665,150 665,296.45 710.82,296.45 727.47,313.1 C17.1 ; 822,832 830,840 926.04,840 D1.2 ; U2.3 857.82,287.72 837.28,287.72 828.55,296.45 773.65,296.45 C17.1@757.51,312.59 ; U2.2 786.53,312.59 C17.1@757.51,312.59 ; U2.1 841.18,338.18 829,326 799.43,326 786.53,313.1 C17.1 ; C2.1@975.35,1454.65 C2.1 1037,1438 1037,1344.06 C11.2@1009.94,1317 ; C11.2@998.72,1328.78 998.72,1326.28 1004.5,1320.5 C11.2 ; U1.14 1006.8,1303.14 ; C17.1 C17.1@757.51,312.59
  Top Layer w40: C1.1@667,1256 715.17,1256 735.17,1276 735.17,1407.43 765.75,1438 C2.1 992.9,1438.9 1037,1438.9 C3.1@1079.8,1438.9 ; C3.1 C3.1@1079.8,1438.9 ; T1.D@1255,1437 T1.D@1255,1439.8 ; T1.D@1337,1411 1308.2,1439.8 T1.D@1255,1439.8 ; C3.1@1079.8,1438.9 1165.1,1438.9 C4.1 T1.D@1255,1439.8
  Top Layer w60: C1.1 676.5,1249.5 676.5,994.5 678,993 T2.3 ; C9.1 C9.1@699,493 ; T2.3@686,996 712,970 799.5,882.5 799.5,832 799.5,733.5 699,633 C9.1@699,493 ; 755,339 755,409 728.5,435.5 728.5,483 718.5,493 C9.1@699,493
VCC5: C6.1 R1.2 U1.9 | length 425.8
  Top Layer w10: R1.2 810.94,1129.06 854.02,1085.98 876.41,1085.98 v1(879.39,1083) ; U1.9 1068.8,1092.37 1078.17,1083 v1(1096,1083) 1124.47,1083 C6.1
  Bottom Layer w10: v1(879.39,1083) v1(1096,1083)
pads on no net: U1.1 U2.5

## Polygon pours and split planes (outlines as drawn)
GND on Top Layer (solid, pour order 12): 940,1510 1208,1510 1228,1530 1228,1621 1215,1634 950,1634 940,1624
GND on Top Layer "Top Layer-GND" (solid, pour order 10): 14,704 36,726 447,726 464,709 464,310 449,295 33,295 14,314
GND on Top Layer "Top Layer-GND 1" (solid, pour order 8): 408,1431 446,1393 446,1122.98 409,1085.98 42.02,1085.98 16,1112 16,1415 32,1431
GND on Top Layer "Top Layer-GND 2" (solid, pour order 6): 1297,319.5 1323.5,346 1999,346 2032,313 2032,38 2024,30 1317,30 1297,50
+12V6 on Top Layer "Top Layer-+12V6" (solid, pour order 2): 1254,933 1501,933 1556,988 1556,1165 1573,1182 1948,1182 1965,1199 1965,1304 1987,1326 2267,1326 2288,1305 2288,571.01 2125.78,570.27 2014,688.5 2014,822 1991,845 1255,845 1255,934
+5V on Top Layer "Top Layer-+5V" (solid, pour order 0): 1235.51,485 1315,485 1332,502 1332,665 1358,691 1946,691 2172,465 2172,383 1188,383 1188,485
GND on Bottom Layer "Bottom Layer-GND" (solid, pour order 4): 0,1749 2747,1749 2747,0 0,0 0,1749

## Keep-outs
Bottom Layer:
  lines w5: 553,774 1202,774 1202,689 1988,689 2184,493 2743,493
Keep-Out Layer:
  lines w10: 0,0 0,1732.28 2755.91,1732.28 2755.91,0 0,0

## Other copper
Top Layer:
  rectangle net +12V6: 2117,706 2154,755.25
  rectangle net +12V6: 2116,1233 2156,1269
  rectangle net +12V6: 2017,1188 2255,1224
  rectangle net GND: 1866,105 1892,308
  rectangle net GND: 1428,105.8 1452,308
  rectangle net +5V: 1421,433 1463,673
  rectangle net GND: 1381,187 1931,228
  rectangle net +5V: 1860,436 1901,677
  rectangle net +5V: 1808,549 1965,590
  rectangle net GND: 2571,716 2730,888.8
  rectangle net +12V6: 1623,990 1896,1048
  rectangle net +12V6: 1705,890 1819,1128
  rectangle net +12V6: 1274,852 1992,924
  region net +VBAT: 43,1017 19,993 19,802 36,785 313,785 314,786 314,1017
  region net +12V6: 2289,678 2297,670 2725,670 2725,513 2185,513 2028,670 2028,674 2028,705 2289,705
  region net GND: 2382,707 2382,1369 2575,1369 2596,1348 2596,702 2581,687 2402,687
  region net GND: 1237,771 1237,808 1248,819 1980,819 1991,808 1991,725 1980,714 1249.75,714 1237,726.75
  region net VBAT: 901,1498 1217,1498 1261,1542 1407.78,1542 1418,1531.78 1418,1322 1411,1315 1219,1315 1208,1326 1208,1403 1200,1411 901,1411
  region net VBAT: 831,692 831,1025 771,1085 771,1398 784,1411 823,1411 918,1411 918,1497 605,1497 593,1485 593,1068 593,914 610,897 717,897 749,865 749,778.75 749,751 739,741 584,741 584,609 584,361 657,288 831,288
  region net GND: 1228,359 1239,348 1239,246 1230,237 1139,237 1134,242 1134,282 1124,292 1071,292 1066,297 1066,359
  region net GND: 811,169 815,173 815,267 810,272 698.45,272 691.45,265 691.45,177.55 700,169
  region net +5V: 1060,406 1060,657 1075,672 1221,672 1229,664 1229,395 1217,383 1068,383 1059.96,391.04 1059.96,405
  region net NetC19_2: 920.21,400 920.21,472.79 857.82,535.18 857.82,667.82 864,674 972,674 981,665 981,402 920,402
  region net GND: 1231,1081 1232,1082 1433.76,1082 1438.76,1077 1438.76,985.45 1431.8,978.49 1237.51,978.49 1231,985
  region net NetC10_2: 1231.5,1298 1416,1298 1431,1313 1431,1451.24 1435.72,1455.96 1644,1455.96 1644,1592 1889,1592 1889,1459 1889,1267.46 1515,1267.46 1515,1093 1244,1093 1231.5,1105.5

## Silkscreen, mask and mechanical layers (free items; w line width, h text height)
Top Overlay:
  drawing of 11 lines, arcs and shapes, not listed
  text "GND" at 36,1352 h100
  text "PWR" at 32,998 h100
  text "GND" at 2676,895 h80 r90
  text "+12V" at 2581.6,508 h80 r90
  text "+5V" at 2577,317 h100 r90
  text "GND" at 2577,97 h100 r90
Mechanical 1:
  lines w10: 0,0 2755.91,0 2755.91,1732.28 0,1732.28 0,0
Mechanical 4:
  drawing of 11 lines, arcs and shapes, not listed
  text "GND" at 36,1352 h100
  text "PWR" at 32,998 h100
  text "GND" at 2676,895 h80 r90
  text "+12V" at 2581.6,508 h80 r90
  text "+5V" at 2577,317 h100 r90
  text "GND" at 2577,97 h100 r90

## Dimensions
0,1732.28 to 0,0 on Mechanical 2
0,0 to 2755.91,0 on Mechanical 2